# Altium PCB 风扇_V1.3.PcbDoc
Units mm, origin at the board's own origin, x right, y up, seen from the top; angles counter-clockwise.
Board outline 21 x 121 mm, 2 copper layers (Top Layer, Bottom Layer); 58 components, 41 nets, 184 pads, 64 vias.
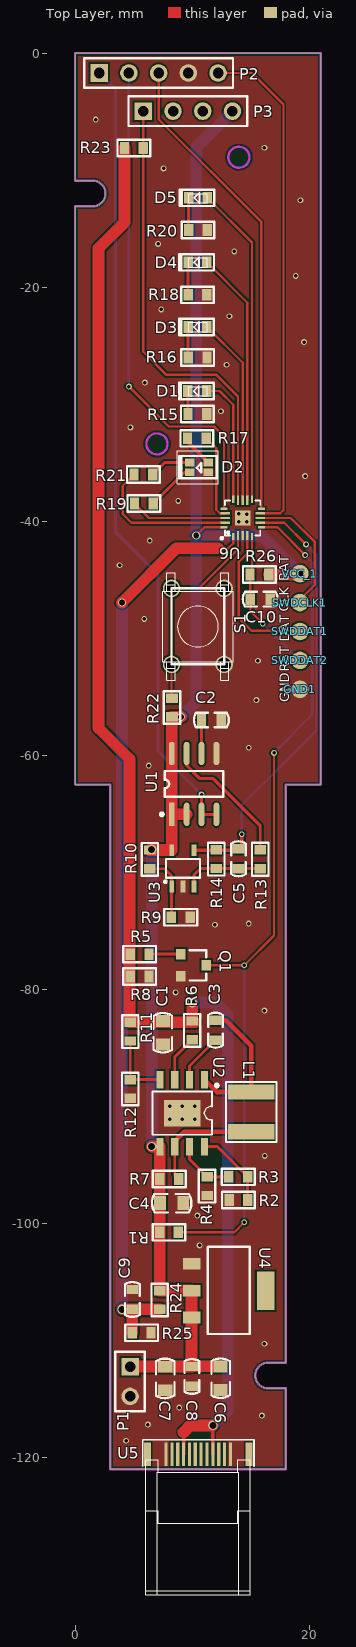
[diagram p0: Top Layer view]
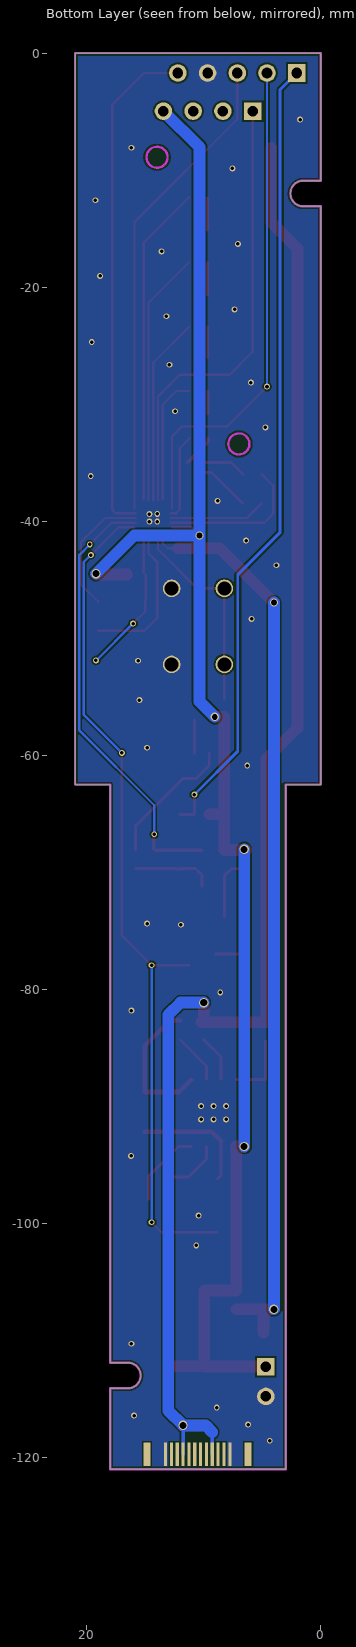
[diagram p1: Bottom Layer view, seen from below]

## Layer stack, top to bottom
Top Layer: signal copper 0.0356
Dielectric: dielectric 0.32, FR-4, Dk 4.8
Bottom Layer: signal copper 0.0356

## Board outline
0,-62.5 0,-13.1 1.5,-13.1 ccw(c1.5,-12) 1.5,-10.9 0,-10.9 0,0 21,0 21,-62.5 18,-62.5 18,-111.9 16.5,-111.9 ccw(c16.5,-113) 16.5,-114.1 18,-114.1 18,-121 3,-121 3,-62.5

## Design rules (kind name [scope] priority, off if disabled: settings)
Clearance [All] p1: gap=0.15
FabricationTestPointUsage TestPointUsage [All] p1: valid=0 allowmultiple=FALSE
FabricationTestpoint Testpoint [(IsPad And (OnTopLayer Or OnBottomLayer))] p1: side=3 testpointundercomponent=TRUE minsize=1.016 maxsize=2.54 preferedsize=1.524 minholesize=0 maxholesize=1.016 preferedholesize=0.813 testpointgrid=0.025 allowsidetop=TRUE allowsidebottom=TRUE usegrid=TRUE gridtolerance=0
PlaneConnect [All] p1: planeconnectstyle=Direct reliefexpansion=0.508 reliefentries=4 reliefconductorwidth=0.254 reliefairgap=0.254
PolygonConnect [All] p1: connectstyle=Direct reliefconductorwidth=0.254 reliefentries=4 polygonreliefangle="90 Angle"
RoutingVias [All] p1: holewidth=0.3 width=0.5 viastyle="Through Hole" minholewidth=0.3 minwidth=0.5 maxholewidth=0.711 maxwidth=1.27
SilkscreenOverComponentPads [All] p1: minsilkscreentomaskgap=0.254
SolderMaskExpansion [All] p1: expansion=0.102
Width [All] p1: maxlimit=1 minlimit=0.15 preferedwidth=0.254
24 further rules are at their usual default settings.

## Components (designator, comment, footprint, x,y, rotation, side; value= is the part's Value field where it differs from the comment)
C1 "10uF" C-0805 7.498,-83.711 r270 top
C2 "0.01uF" C-0603 11.648,-56.983 r0 top
C3 "47nF" C-0603 12.002,-83.49 r270 top
C4 "22uF" C-0805 8.251,-98.274 r0 top
C5 "1nF" C-0603 13.965,-68.847 r270 top
C6 "22uF" C-0805 12.44,-113.235 r90 top
C7 "22uF" C-0805 7.705,-113.255 r90 top
C8 "1uF" C-0603 9.983,-113.083 r90 top
C9 "1uF" C-0603 4.892,-106.5 r270 top
C10 "0.1uF" C-0603 15.824,-46.667 r180 top
D1 "LED0" LED-0603 9.069,-28.2 r0 top
D2 "LED" 0603*2-LED 9.794,-35.834 r0 top
D3 "LED0" LED-0603 9.094,-22.724 r0 top
D4 "LED0" LED-0603 9.095,-17.196 r0 top
D5 "LED0" LED-0603 9.129,-11.69 r0 top
GND1 "TP" TP-1.5 19.214,-54.369 r90 top
L1 "4.7uH" L-SMD 15.037,-90.477 r270 top
P1 "Header 2" HDR1X2 4.697,-112.246 r270 top
P2 "Header 5" HDR1X5 2.06,-1.702 r0 top
P3 "Header 4" HDR1X4 5.829,-4.963 r0 top
Q1 "8050" SOT-23 11.22,-77.95 r270 top
R1 "10K" R-0603 8.026,-100.769 r180 top
R2 "1K" R-0603 13.96,-97.997 r0 top
R3 "3.9K" R-0603 13.942,-96.021 r0 top
R4 "1.1K" R-0603 11.282,-96.819 r90 top
R5 "1K" R-0603 5.512,-76.998 r0 top
R6 "2K" R-0603 10.005,-83.508 r90 top
R7 "50mR" R-0603 8.045,-96.214 r0 top
R8 "10K" R-0603 5.512,-78.913 r0 top
R9 "100K" R-0603 9.032,-73.842 r180 top
R10 "100K" R-0603 6.383,-68.9 r90 top
R11 "100K" R-0603 4.717,-83.614 r90 top
R12 "100K" R-0603 4.715,-88.522 r90 top
R13 "1K" R-0603 15.824,-68.885 r270 top
R14 "3.3K" R-0603 12.065,-68.872 r90 top
R15 "500R" R-0603 10.447,-30.841 r0 top
R16 "500R" R-0603 10.47,-26.017 r0 top
R17 "500R" R-0603 10.411,-32.918 r180 top
R18 "500R" R-0603 10.46,-20.655 r0 top
R19 "500R" R-0603 5.875,-38.496 r0 top
R20 "500R" R-0603 10.503,-15.11 r0 top
R21 "500R" R-0603 5.839,-36.01 r0 top
R22 "47K" R-0603 8.28,-55.918 r270 top
R23 "47K" R-0603 5.029,-8.115 r180 top
R24 "1M" R-0603 7.231,-106.548 r270 top
R25 "1M" R-0603 5.69,-109.347 r0 top
R26 "47K" R-0603 15.751,-44.554 r0 top
S1 "SW-PB" SW-6*6*4.3 10.493,-48.989 r90 top
SWDCLK1 "TP" TP-1.5 19.214,-46.953 r90 top
SWDDAT1 "TP" TP-1.5 19.214,-49.425 r90 top
SWDDAT2 "TP" TP-1.5 19.214,-51.897 r90 top
U1 "ACS712ELCTR-05B-T" SOIC8 10.17,-62.448 r0 top
U2 "LP28300BSPF" ESOP8 9.153,-90.578 r180 top
U3 "LM321" SOT-23-5 9.215,-69.666 r0 top
U4 "AMS1117-5V" SOT-223 13.124,-105.75 r270 top
U5 "USB Type-C" "USB-type C" 10.523,-119.72 r0 top
U6 "N76E003AQ20" "QFN-20 0.4mm" 14.321,-39.726 r0 top
VCC_1 "TP" TP-1.5 19.214,-44.481 r90 top

## Footprints (in the part's own frame and the unit in brackets; to place one, negate y for a bottom-side part, rotate by r counter-clockwise, add the part's x,y. Pads: shape width x height; smd on the part's side, far side on the other; paste and mask are expansions set on the pad)
0603*2-LED [mm]
  rect 0.8x0.65 smd: 1(1.6,0.85) 2(1.6,0) 3(0,0) 4(0,0.85)
  silkscreen extent -0.9,-0.5 2.3,1.4
C-0603 [mm]
  rect 0.8x1 smd: 1(-0.85,0) 2(0.85,0)
  silkscreen extent -1.49,-0.63 1.49,0.63
C-0805 [mm]
  rect 1x1.2 smd: 1(-1,0) 2(1,0)
  silkscreen extent -1.68,-0.8 1.69,0.8
ESOP8 [mil]
  rect 24x59.06 smd: 1(-75,-112.5) 2(-25,-112.5) 3(25,-112.5) 4(75,-112.5) 5(75,112.5) 6(25,112.5) 7(-25,112.5) 8(-75,112.5)
  rect 124.02x88.98 smd: 9(0,0)
  silkscreen extent -121,-98 100,73
HDR1X2 [mm] "Connector; Header; 2 Position"
  rect 1.5x1.5 hole 0.9: 1(0,0)
  round 1.5 hole 0.9: 2(2.54,0)
  silkscreen extent -1.27,-1.27 3.81,1.27
HDR1X4 [mm] "Connector; Header; 4 Position"
  rect 1.5x1.5 hole 0.9: 1(0,0)
  round 1.5 hole 0.9: 2(2.54,0) 3(5.08,0) 4(7.62,0)
  silkscreen extent -1.27,-1.27 8.89,1.27
HDR1X5 [mm] "Connector; Header; 5 Position"
  rect 1.5x1.5 hole 0.9: 1(0,0)
  round 1.5 hole 0.9: 2(2.54,0) 3(5.08,0) 4(7.62,0) 5(10.16,0)
  silkscreen extent -1.27,-1.27 11.43,1.27
L-SMD [mm]
  rect 1.3x4 smd: 1(1.692,0.016) 2(-1.708,0.016)
  silkscreen extent -2.57,-2.14 2.56,2.17
LED-0603 [mm]
  rect 0.8x1 smd: 1(2.17,-0.68) 2(0.57,-0.68)
  silkscreen extent -0.19,-1.38 2.77,0.02
"QFN-20 0.4mm" [mm]
  rect 0.2x0.6 smd: 1(-0.8,-1.6) 5(0.8,-1.6) 11(0.8,1.6) 15(-0.8,1.6)
  rect 0.2x0.8 smd: 2(-0.4,-1.5) 3(0,-1.5) 4(0.4,-1.5) 12(0.4,1.5) 13(0,1.5) 14(-0.4,1.5)
  rect 0.6x0.2 smd: 6(1.6,-0.8) 10(1.6,0.8) 16(-1.6,0.8) 20(-1.6,-0.8)
  rect 0.8x0.2 smd: 7(1.5,-0.4) 8(1.5,0) 9(1.5,0.4) 17(-1.5,0.4) 18(-1.5,0) 19(-1.5,-0.4)
  rect 1.3x1.3 smd: 21(0,0)
  silkscreen extent -1.88,-1.82 1.5,1.5
R-0603 [mm]
  rect 0.8x1 smd: 1(-0.8,0) 2(0.8,0)
  silkscreen extent -1.4,-0.7 1.4,0.7
SOIC8 [mm]
  rect 0.5x2 smd: 1(-1.905,-2.6)
  oval 0.5x2 smd: 2(-0.635,-2.6) 3(0.635,-2.6) 4(1.905,-2.6) 5(1.905,2.6) 6(0.635,2.6) 7(-0.635,2.6) 8(-1.905,2.6)
  silkscreen extent -2.88,-2.72 2.5,1.1
SOT-23 [mm]
  rect 0.9x0.8 smd: 1(-0.95,-2.2) 2(0.95,-2.2) 3(0,0)
  silkscreen extent -1.3,-1.44 1.3,0
SOT-23-5 [mm]
  rect 0.4x1 smd: 1(-0.95,-1.55) 2(0,-1.55) 3(0.95,-1.55) 4(0.95,1.55) 5(-0.95,1.55)
  silkscreen extent -1.6,-1.24 1.45,0.8
SOT-223 [mm]
  rect 1x1.5 smd: 1(-2.3,-3.15) 2(0,-3.15) 3(2.3,-3.15)
  rect 3.3x1.5 smd: ""(0,3.15)
  silkscreen extent -3.76,-1.8 3.7,1.8
SW-6*6*4.3 [mm]
  round 1.5 hole 1.2: 1(-3.25,2.25) 1(3.25,2.25) 2(-3.25,-2.25) 2(3.25,-2.25)
  silkscreen extent -3.25,-2.25 3.25,2.25
TP-1.5 [mm]
  round 1.5 smd: 1(0,0)
"USB-type C" [mm]
  rect 0.27x2 smd: 1(-2.75,0) 2(-2.25,0) 3(-1.75,0) 4(-1.25,0) 5(-0.75,0) 6(-0.25,0) 7(0.25,0) 8(0.75,0) 9(1.25,0) 10(1.75,0) 11(2.25,0) 12(2.75,0)
  rect 0.27x2 smd far side: 13(2.75,0) 14(2.25,0) 15(1.75,0) 16(1.25,0) 17(0.75,0) 18(0.25,0) 19(-0.25,0) 20(-0.75,0) 21(-1.25,0) 22(-1.75,0) 23(-2.25,0) 24(-2.75,0)
  rect 0.6x2 smd: ""(-4.32,0) ""(4.32,0)
  rect 0.6x2 smd far side: ""(-4.32,0) ""(4.32,0)
  silkscreen extent -4.73,-1.03 4.76,1.22

## Part data
C1 C2 C3 C4 C5 C6 C7 C8 C9 C10: library part Cap, "Capacitor"
D1 D3 D4 D5: "Typical INFRARED GaAs LED"
L1: library part Inductor, "Inductor"
P1: "Header, 2-Pin"
P2: "Header, 5-Pin"
P3: "Header, 4-Pin"
Q1: library part NPN, "NPN Bipolar Transistor"
R1 R2 R3 R4 R5 R6 R7 R8 R9 R10 R11 R12 R13 R14 R15 R16 R17 R18 R19 R20 R21 R22 R23 R24 R25 R26: library part Res1, "Resistor"
S1: "Switch"
U4: library part AMS1117

## Via types
v1: diameter 0.5, hole 0.3, Top Layer to Bottom Layer, 55 vias
v2: diameter 0.8, hole 0.6, Top Layer to Bottom Layer, 6 vias
v3: diameter 0.7, hole 0.5, Top Layer to Bottom Layer, 3 vias

## Nets (pads, with @x,y where several pads share a name; then routed paths per layer and width w, separated by ;. In a path a pad name is that pad's centre, name@x,y a point inside that pad or via, vN(x,y) a via of type N, cw(c..) or ccw(c..) an arc to the next point about the centre after c; other vN are vias at no path point)
5V: C1.1 R5.1 R6.2 R8.1 R11.2 R23.2 U5.4 U5.9 U5.16 U5.21 | length 137.1
  Top Layer w0.3: U5.4 9.273,-117.837 ; U5.9 v2(11.773,-117.267)
  Top Layer w1: R23.2 4.229,-14.461 2,-16.69 2,-57.67 4.65,-60.32 4.65,-82.814 R6.2@10.23,-82.814 ; 9.273,-117.837 9.843,-117.267 v2(11.773,-117.267) ; R6.2 v2(10.005,-81.135)
  Bottom Layer w0.3: U5.21 9.273,-117.837 ; U5.16 v2(11.773,-117.267)
  Bottom Layer w1: 9.273,-117.837 9.843,-117.267 v2(11.773,-117.267) 13.04,-116 13.04,-82.18 11.995,-81.135 v2(10.005,-81.135)
BAT: C4.1 C6.2 C7.2 C8.2 P1.1 P3.4 R1.2 R7.1 R10.2 R22.2 R24.1 R26.2 U1.1 U1.2 U1.8 U2.5 U3.5 U4.2 U4.3 U6.20 VCC_1.1 | length 139.6
  Top Layer w0.2: v3(10.36,-41.22) 11.054,-40.526 U6.20
  Top Layer w1: P1.1@4.711,-112.233 C8.2 ; R10.2 U3.5@8.249,-68.1 ; v2(6.546,-93.436) U2.5@7.231,-93.436 ; R24.1 7.231,-96.214 U2.5@7.231,-93.436 ; R24.1@7.248,-105.731 9.955,-105.731 9.955,-112.205 C6.2@12.409,-112.205 ; U2.5 U2.5@7.231,-93.436 ; U3.5 R22.2@8.265,-56.804 ; U1.1 U1.2 ; R22.2 v3(9.062,-56.718) ; R26.2 VCC_1.1@19.141,-44.554
  Bottom Layer w1: v2(6.546,-93.436) v2(6.546,-68.044) ; v3(9.062,-56.718) 10.36,-55.42 v3(10.36,-41.22) ; P3.4 10.36,-8.052 v3(10.36,-41.22) ; v2(19.214,-44.481) 15.953,-41.22 v3(10.36,-41.22)
BAT_ADC: C9.2 R24.2 R25.1 U6.1 | length 77.7
  Top Layer w0.2: 12.21,-42.32 13.08,-42.32 13.521,-41.879 U6.1
  Top Layer w1: v3(4.01,-46.95) 8.64,-42.32 12.21,-42.32 ; v2@4.08,-107.35 C9.2 R25.1@4.892,-109.345 ; C9.2@4.894,-107.348 R24.2
  Bottom Layer w1: v2(4.01,-107.342) v3(4.01,-46.95)
CLK: SWDCLK1.1 U6.8 | length 11.4
  Top Layer w0.2: U6.8 16.72,-39.726 ; 16.593,-39.726 16.72,-39.726 ; SWDCLK1.1@19.024,-46.89 20.49,-45.424 20.49,-41.79 18.426,-39.726 16.72,-39.726
DAT: SWDDAT1.1 U6.4 | length 12.8
  Top Layer w0.2: U6.4 14.721,-42.749 13.99,-43.48 13.99,-48.28 15.072,-49.362 SWDDAT1.1@19.024,-49.362
GND: C1.2 C2.2 C4.2 C6.1 C7.1 C8.1 C9.1 C10.1 D2.2 GND1.1 P1.2 P2.4 Q1.2 R2.1 R4.1 R8.2 R9.1 R12.1 R15.2 R16.2 R18.2 R20.2 R25.2 S1.2 U1.5 U2.9 U3.2 U4.1 U5.1 U5.12 U5.13 U5.24 U6.3 U6.21
  other v1: 4.36,-118.57 6.22,-117.2 15.96,-116.42 8.9,-115.74 16.18,-110.29 10.64,-101.89 10.45,-99.34 16.21,-94.24 8.09,-91.12 9.16,-91.12 10.23,-91.12 8.09,-89.98 9.16,-89.98 10.23,-89.98 16.18,-81.82 8.59,-80.27 11.95,-74.48 14.84,-74.39 6.29,-60.89 14.84,-59.36 15.5,-55.29 15.62,-51.92 5.91,-48.35 3.8,-43.77 6.38,-41.66 13.98,-40.03 14.65,-40.03 14.65,-39.39 13.98,-39.38 8.82,-38.27 19.66,-36.15 4.73,-31.98 12.46,-30.61 5.97,-28.15 12.94,-26.63 19.57,-24.7 13.19,-22.49 7.37,-21.9 18.86,-19.04 13.6,-16.95 7.09,-16.3 19.26,-12.57 7.56,-9.86 16.18,-8.09 1.77,-5.69
IP-: P2.1 U1.3 U1.4 | length 68.2
  Top Layer w0.254: v1(10.805,-63.355) U1.3 U1.4
  Bottom Layer w0.254: P2.1 3.47,-3.112 3.47,-40.95 7.1,-44.58 7.1,-59.651 v1(10.805,-63.355)
KEY: R22.1 S1.1 U6.2 | length 17.7
  Top Layer w0.2: R22.1@8.24,-55.204 S1.1@8.24,-52.242 ; S1.1@8.243,-52.239 8.243,-45.739 10.571,-45.739 13.921,-42.389 U6.2
KEY_TOP: P3.1 R23.1 U6.14 | length 39.1
  Top Layer w0.2: P3.1 R23.1 5.829,-25.529 7.8,-27.5 12.08,-27.5 13.921,-29.341 U6.14
LED1: D1.1 U6.15 | length 10.8
  Top Layer w0.2: D1.1 12.35,-28.88 13.521,-30.051 U6.15
LED2: D3.1 U6.13 | length 16.1
  Top Layer w0.2: D3.1 14.321,-26.461 U6.13
LED3: D4.1 U6.12 | length 21.8
  Top Layer w0.2: D4.1 14.721,-21.332 U6.12
LED4: D5.1 U6.11 | length 27.3
  Top Layer w0.2: D5.1 15.121,-16.191 U6.11
LED_B: R21.1 U6.19 | length 12.8
  Top Layer w0.2: R21.1 4.08,-36.969 4.08,-39.38 4.826,-40.126 U6.19
LED_G: R19.1 U6.18 | length 8.3
  Top Layer w0.2: R19.1 6.304,-39.726 U6.18
LED_R: R17.1 U6.17 | length 7.3
  Top Layer w0.2: R17.1 12.068,-33.775 12.068,-39.027 12.367,-39.326 U6.17
M_CW: P2.3 U6.10 | length 40.9
  Top Layer w0.2: P2.3 7.14,-5.65 15.921,-14.431 U6.10
M_FG: P2.2 U6.16 | length 42.8
  Top Layer w0.2: v1(4.6,-28.5) 8.01,-31.91 11.86,-31.91 12.721,-32.771 U6.16
  Bottom Layer w0.2: v1(4.6,-28.5) P2.2
M_PWM: P2.5 U6.9 | length 43.5
  Top Layer w0.2: P2.5 15.122,-1.702 17.81,-4.39 17.81,-39.05 17.534,-39.326 U6.9
NetC2_1: C2.1 U1.6 | length 2.9
  Top Layer w0.254: U1.6 C2.1@10.805,-56.989
NetC3_1: C3.1 L1.2 U2.1 | length 12.3
  Top Layer w0.4: U2.1 12.107,-88.769 L1.2 15.053,-84.833 12.86,-82.64 C3.1
NetC3_2: C3.2 U2.2 | length 4.3
  Top Layer w0.254: U2.2 9.788,-86.554 C3.2
NetC5_2: C5.2 R13.2 R14.1 U3.3 | length 7.3
  Top Layer w0.254: U3.3 10.165,-70.215 10.708,-69.672 R14.1 ; R14.1@11.675,-69.706 12.367,-69.706 12.377,-69.696 R13.2@15.824,-69.696
NetD1_2: D1.2 R15.1 | length 2
  Top Layer w0.254: D1.2 9.647,-28.888 R15.1
NetD2_1: D2.1 R17.2 | length 2.8
  Top Layer w0.3: R17.2 9.611,-33.202 D2.1
NetD2_3: D2.3 R19.2 | length 4.2
  Top Layer w0.254: R19.2 9.337,-35.834 D2.3
NetD2_4: D2.4 R21.2 | length 3.6
  Top Layer w0.254: R21.2 7.665,-34.984 D2.4
NetD3_2: D3.2 R16.1 | length 2.6
  Top Layer w0.254: R16.1@9.664,-26.011 D3.2
NetD4_2: D4.2 R18.1 | length 2.8
  Top Layer w0.254: R18.1@9.665,-20.65 D4.2
NetD5_2: D5.2 R20.1 | length 2.7
  Top Layer w0.254: R20.1@9.699,-15.107 D5.2
NetQ1_1: Q1.1 R5.2 | length 2.5
  Top Layer w0.254: R5.2@6.493,-77 Q1.1
NetR2_2: R2.2 R3.2 U2.8 | length 6.7
  Top Layer w0.254: U2.8 12.157,-93.436 R3.2 R2.2@14.742,-97.979
NetR3_1: R3.1 R4.2 U2.7 | length 5.1
  Top Layer w0.254: U2.7 9.788,-94.525 R4.2 R3.1@13.14,-96.019
NetR6_1: R6.1 U2.3 | length 4
  Top Layer w0.254: U2.3 8.518,-85.795 R6.1
NetR9_2: R9.2 R10.1 U3.1 | length 5.6
  Top Layer w0.254: R10.1 7.64,-69.7 8.243,-70.303 R9.2@8.243,-73.831
NetR11_1: R11.1 R12.2 U2.4 | length 5.8
  Top Layer w0.254: R11.1 4.716,-84.416 R12.2 U2.4
RS: L1.1 R7.2 U2.6 | length 10.2
  Top Layer w0.254: U2.6@8.518,-92.972 U2.6 8.518,-95.887 R7.2
  Top Layer w0.4: U2.6@8.518,-92.972 9.321,-92.169 L1.1
RST: C10.2 R26.1 SWDDAT2.1 U6.5 | length 12.2
  Top Layer w0.2: R26.1@14.974,-44.578 C10.2 14.99,-46.683 14.99,-47.7 v1(16.04,-48.75) ; R26.1@15.121,-44.431 U6.5
  Bottom Layer w0.2: v1(16.04,-48.75) 19.187,-51.897 v1(19.214,-51.897)
USB_CHECK: Q1.3 R1.1 U6.6 | length 73.7
  Top Layer w0.2: R1.1 13.601,-100.769 v1(14.46,-99.91) ; Q1.3 v1(14.46,-77.95) 17,-75.41 v1(17,-59.8) ; U6.6 17.286,-40.526 v1(19.65,-42.89)
  Bottom Layer w0.2: v1(14.46,-99.91) v1(14.46,-77.95) ; v1@17.12,-59.8 v1(17,-59.8) 20.27,-56.53 20.27,-43.51 v1(19.65,-42.89)
V_MOTOR: C5.1 R14.2 U3.4 U6.7 | length 37.7
  Top Layer w0.2: U6.7 17.876,-40.126 v1(19.74,-41.99)
  Top Layer w0.3: U3.4 C5.1@14.149,-68.116 ; C5.1@14.26,-68.006 v1@14.26,-66.77
  Bottom Layer w0.2: v1(14.24,-66.75) 14.24,-64.27 20.63,-57.88 20.63,-42.88 v1(19.74,-41.99)
VIOUT: R13.1 U1.7 | length 11.5
  Top Layer w0.254: U1.7 9.535,-60.875 10.66,-62 11.8,-62 15.824,-66.024 R13.1
pads on no net: P3.2 P3.3 U4. U5. U5.2 U5.3 U5.5 U5.6 U5.7 U5.8 U5.10 U5.11 U5.14 U5.15 U5.17 U5.18 U5.19 U5.20 U5.22 U5.23

## Polygon pours and split planes (outlines as drawn)
GND on Top Layer "GND" (solid, remove dead copper, pour order 1000): 0,0 21,0 21,-121 21.01,-121.01 21,-121 -0.01,-121 -0.01,-0.01 0,0
GND on Bottom Layer "GND" (solid, remove dead copper, pour order 1001): 0,0 21,0 21,-121 21.01,-121.01 21,-121 -0.01,-121 -0.01,-0.01 0,0

## Keep-outs
Keep-Out Layer:
  circle w0.2: c14,-8.9 r0.9
  circle w0.2: c7,-33.4 r0.9
  lines w0.2: 0,-62.5 0,-13.1 1.5,-13.1 ccw(c1.5,-12) 1.5,-10.9 0,-10.9 0,0 21,0 21,-62.5 18,-62.5 18,-111.9 16.5,-111.9 ccw(c16.5,-113) 16.5,-114.1 18,-114.1 18,-121 3,-121 3,-62.5 0,-62.5

## Silkscreen, mask and mechanical layers (free items; w line width, h text height)
Top Overlay:
  circle w0.05: c10.5,-49 r1.75
  lines w0.05: 6.03,-131.38 14.97,-131.38 ; 6.03,-124.57 7.1,-124.57 7.1,-125.62 ; 7.03,-131.75 7.03,-121.25 13.97,-121.25 13.97,-131.75 ; 7.03,-125.62 13.97,-125.62 ; 7.1,-121.25 7.1,-120.2 6.03,-120.2 6.03,-131.75 14.97,-131.75 14.97,-120.2 ; 7.85,-52.575 8.55,-52.575 ; 7.85,-52.025 7.85,-53.575 8.55,-53.575 8.55,-52.025 ; 7.85,-45.975 7.85,-44.425 8.55,-44.425 8.55,-45.975 ; 7.85,-45.425 8.55,-45.425 ; 12.45,-52.575 13.15,-52.575 ; 12.45,-52.025 12.45,-53.575 13.15,-53.575 13.15,-52.025 ; 12.45,-45.975 12.45,-44.425 13.15,-44.425 13.15,-45.975 ; 12.45,-45.425 13.15,-45.425 ; 13.9,-125.62 13.9,-124.57 14.97,-124.57 ; 13.9,-121.25 13.9,-120.2 14.97,-120.2 ; 7.475,-52.025 13.525,-52.025 13.525,-45.975 7.475,-45.975 7.475,-52.025 ; 8.75,-36.8 8.75,-34 12.25,-34 12.25,-36.8 8.75,-36.8 ; 9.7,-29.3 9.7,-28.5 11.3,-28.5 11.3,-29.3 9.7,-29.3 ; 9.7,-23.8 9.7,-23 11.3,-23 11.3,-23.8 9.7,-23.8 ; 9.7,-18.3 9.7,-17.5 11.3,-17.5 11.3,-18.3 9.7,-18.3 ; 9.7,-12.8 9.7,-12 11.3,-12 11.3,-12.8 9.7,-12.8
  text "BAT" at 18.25,-45.15 h0.8 r90
  text "CLK" at 18.26,-47.74 h0.8 r90
  text "DAT" at 18.31,-50.29 h0.8 r90
  text "RST" at 18.28,-52.86 h0.8 r90
  text "GND" at 18.28,-55.46 h0.8 r90
Mechanical 2:
  lines w0.05: 3,-5.75 9.6,-5.75 9.6,-0.25 3,-0.25 3,-5.75 ; 11.4,-5.75 11.4,-0.25 18,-0.25 18,-5.75 11.4,-5.75

## Dimensions
0,0 to 21,0 on Keep-Out Layer
0,0 to 3,-121 on Keep-Out Layer